# Altium PCB ORDER_1.PcbDoc
Units mm, origin at the board's own origin, x right, y up, seen from the top; angles counter-clockwise.
Board outline 187.32 x 224.38 mm, 2 copper layers (Top Layer, Bottom Layer); 119 components, 0 nets, 815 pads, 76 vias.
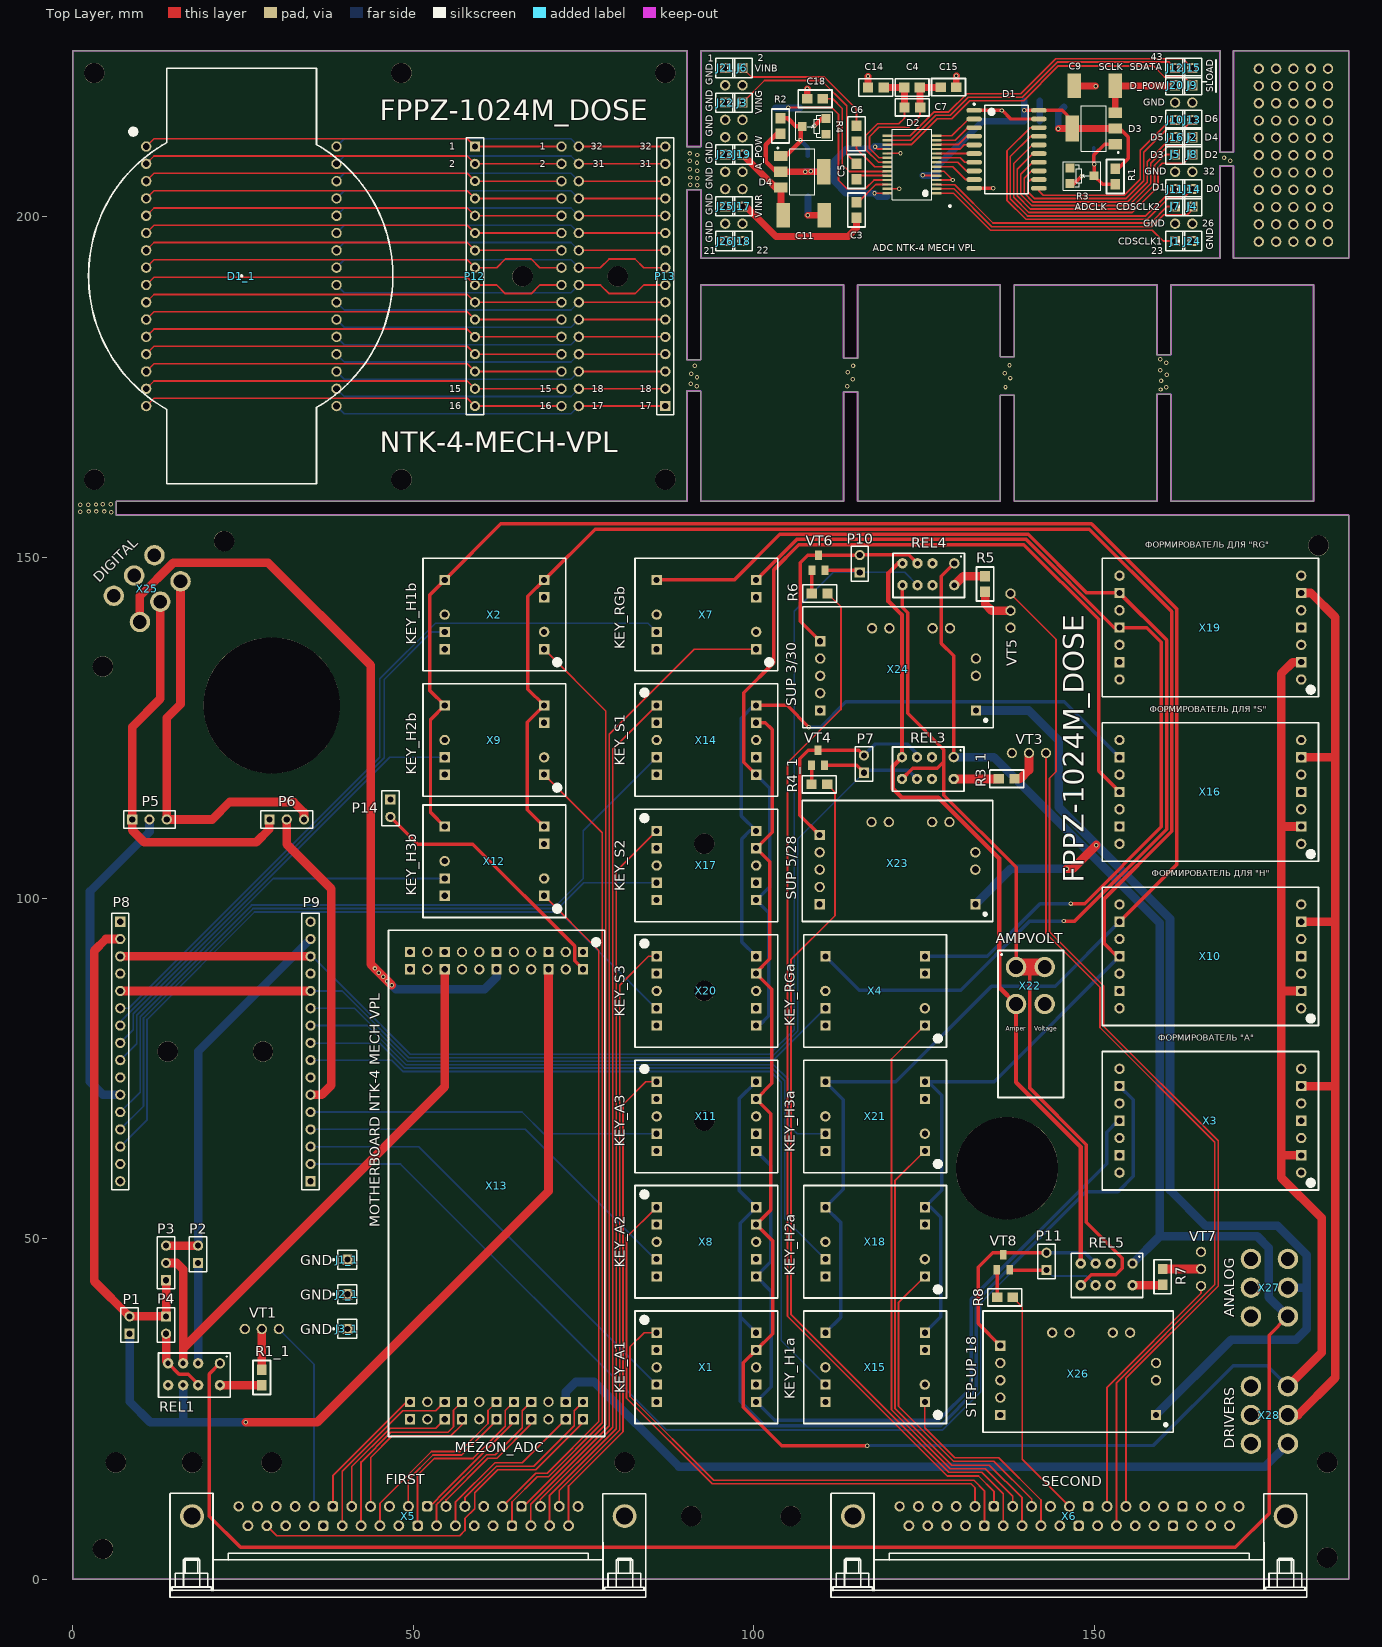
[diagram p0: Top Layer view]
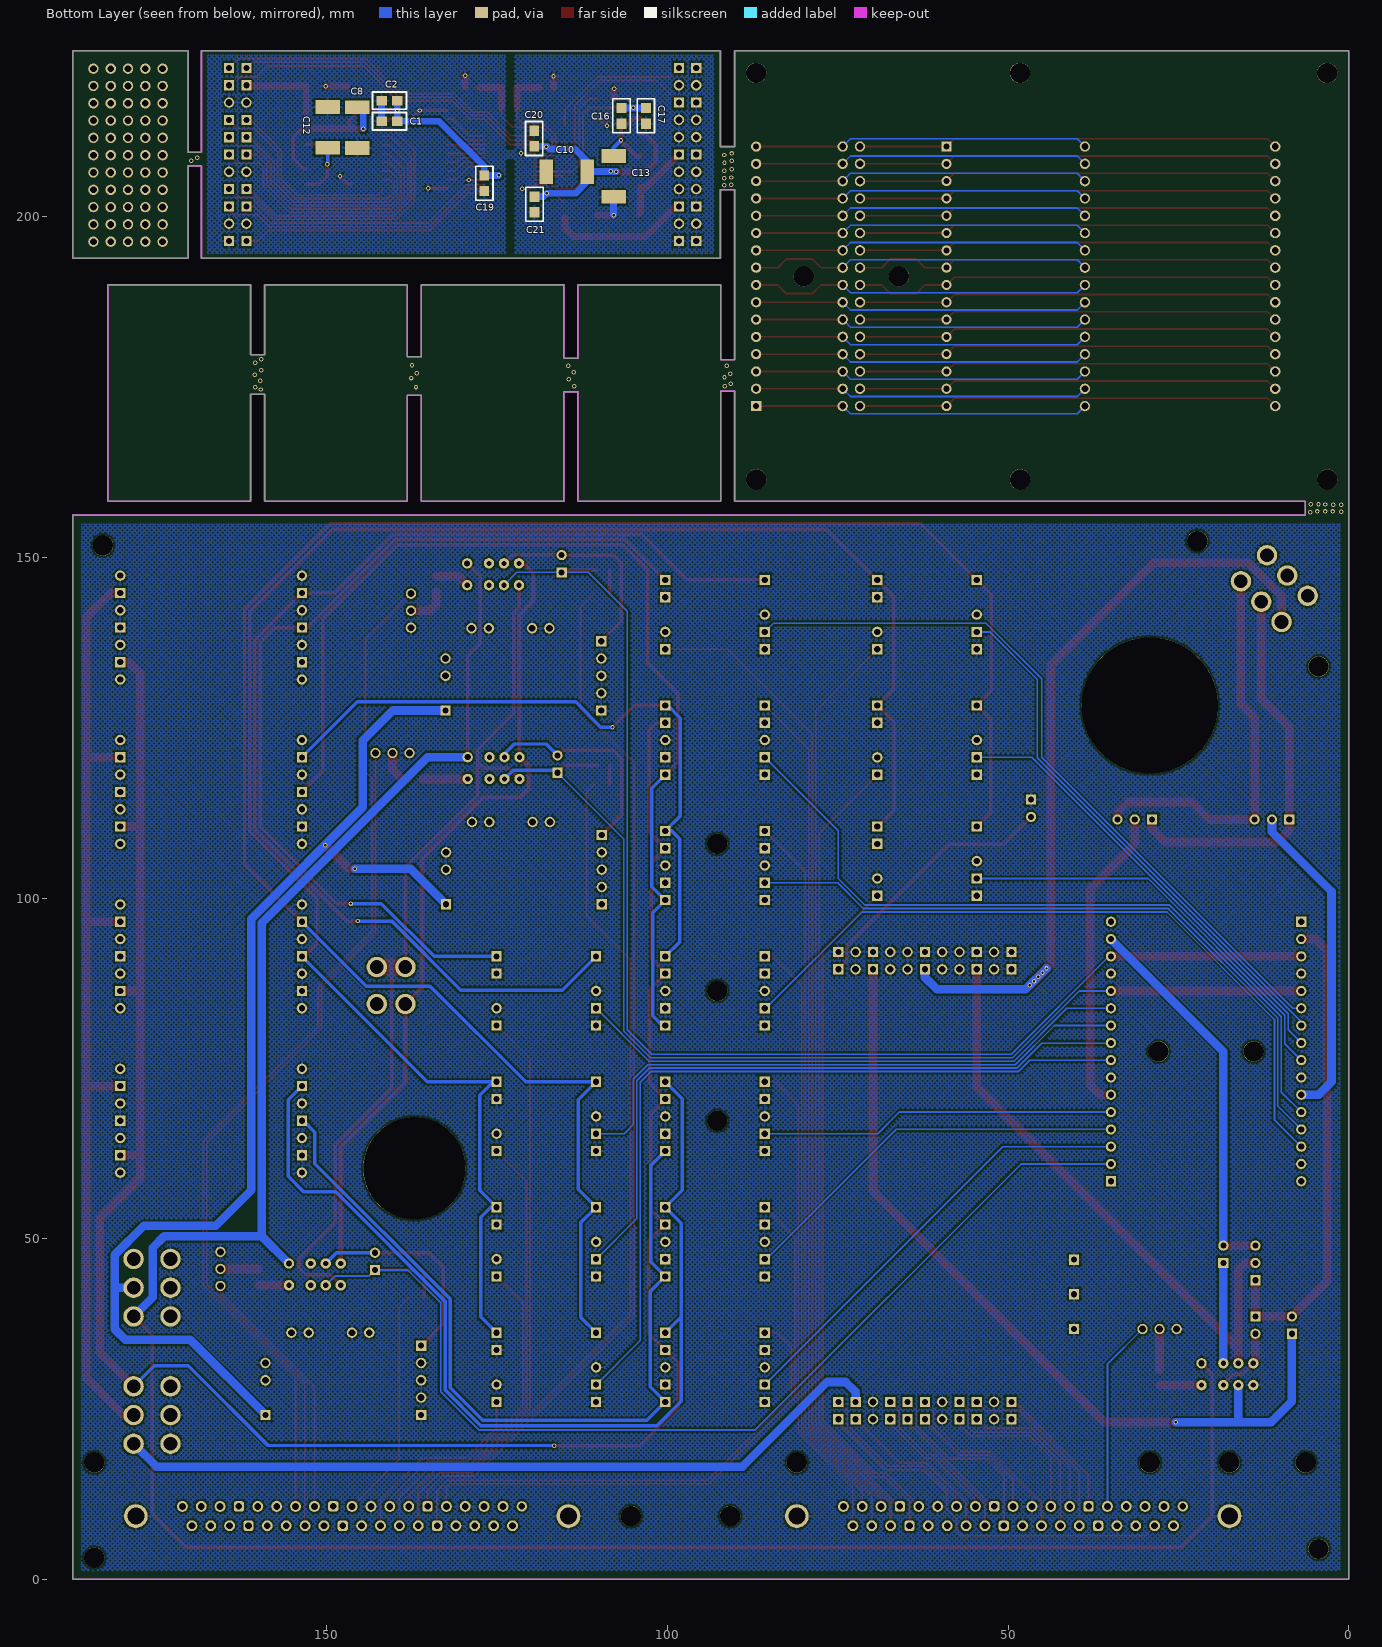
[diagram p1: Bottom Layer view, seen from below]

## Layer stack, top to bottom
Top Solder: solder mask 0.0102, Solder Resist, Dk 3.5
Top Layer: signal copper 0.0356
Dielectric 1: dielectric 0.32, FR-4, Dk 4.8
Bottom Layer: signal copper 0.0356
Bottom Solder: solder mask 0.0102, Solder Resist, Dk 3.5

## Board outline
0,0 0,224.384 90.17,224.384 90.17,210.312 92.229,210.312 92.229,224.384 168.429,224.384 168.429,209.475 170.383,209.475 170.383,224.384 187.325,224.384 187.325,193.904 170.383,193.904 170.383,207.467 168.429,207.467 168.429,193.904 92.229,193.904 92.229,203.962 90.17,203.962 90.17,179.019 92.202,179.019 92.202,189.992 113.157,189.992 113.157,179.248 115.214,179.248 115.214,189.992 136.144,189.992 136.144,179.451 138.201,179.451 138.201,189.992 159.156,189.992 159.156,179.73 161.214,179.73 161.214,189.992 182.143,189.992 182.143,158.242 161.214,158.242 161.214,173.939 159.156,173.939 159.156,158.242 150.749,158.242 138.201,158.242 138.201,173.812 136.144,173.812 136.144,158.242 115.214,158.242 115.214,174.295 113.157,174.295 113.157,158.242 104.445,158.242 92.202,158.242 92.202,174.422 90.17,174.422 90.17,158.242 6.401,158.242 6.401,156.21 187.325,156.21 187.325,0

## Design rules (kind name [scope] priority, off if disabled: settings)
Clearance [All] p1: gap=0.254
PolygonConnect [All] p1: connectstyle=Relief reliefconductorwidth=0.254 reliefentries=4 polygonreliefangle="90 Angle" airgapwidth=0.254
RoutingVias [All] p1: holewidth=0.711 width=1.27 viastyle="Through Hole" minholewidth=0.711 minwidth=1.27 maxholewidth=0.711 maxwidth=1.27
SolderMaskExpansion [All] p1: expansion=0.102
Width [All] p1: maxlimit=0.254 minlimit=0.254 preferedwidth=0.254
29 further rules are at their usual default settings.

## Components (designator, comment, footprint, x,y, rotation, side; value= is the part's Value field where it differs from the comment)
C1 "0,1" CAP_SMALL 143.334,212.75 r180 bottom
C2 "0,01" CAP_SMALL 143.334,215.773 r180 bottom
C3 "0,1" CAP_SMALL 116.334,198.501 r90 top
C4 "10,0" CAP_SMALL 125.732,220.243 r180 top
C5 "0,1" CAP_SMALL 113.794,209.144 r270 top
C6 "0,1" CAP_SMALL 113.794,214.706 r270 top
C7 "0,1" CAP_SMALL 125.757,217.322 r180 top
C8 "100,0" Cap_BIG 143.613,217.195 r0 bottom
C9 "10,0" Cap_BIG 154.129,217.297 r90 top
C10 "100,0" Cap_BIG 110.72,204.724 r90 bottom
C11 "10,0" Cap_BIG 103.227,202.133 r270 top
C12 "10,0" Cap_BIG 151.817,209.017 r180 bottom
C13 "10,0" Cap_BIG 106.021,210.007 r0 bottom
C14 "0,1" CAP_SMALL 120.398,220.243 r180 top
C15 "0,1" CAP_SMALL 126.062,217.754 r0 top
C16 "1,0" CAP_SMALL 105.488,212.319 r90 bottom
C17 "0,1" CAP_SMALL 104.446,217.322 r270 bottom
C18 "0,1" CAP_SMALL 106.478,216.052 r0 top
C19 "0,1" CAP_SMALL 125.63,202.413 r90 bottom
C20 "0,1" CAP_SMALL 120.855,213.995 r270 bottom
C21 "0,1" CAP_SMALL 118.264,199.314 r90 bottom
D1 "74AC541" 20S_M 137.085,209.906 r0 top
D1_1 "FPPZ 1024M" FPPZ_1024M 10.795,210.312 r270 top (schematic designator D1)
D2 "AD9826" SSOP-28 123.217,207.67 r90 top
D3 "LM1117-ADJ" SOT230P700X180-4N 149.887,212.954 r90 top
D4 "LM1117-ADJ" SOT230P700X180-4N 107.113,206.604 r270 top
J1 "CDSCLK1" PIN1 161.825,196.444 r270 top
J1_1 "GND" PIN1 40.335,46.914 r90 top (schematic designator J1)
J2 "D4" PIN1 164.365,211.684 r90 top
J2_1 "GND" PIN1 40.335,41.834 r90 top (schematic designator J2)
J3 "VING" PIN1 98.325,216.764 r90 top
J3_1 "GND" PIN1 40.335,36.754 r90 top (schematic designator J3)
J4 "CDSCLK2" PIN1 164.365,201.524 r90 top
J5 "D3" PIN1 161.825,209.144 r270 top
J6 "VINB" PIN1 98.325,221.844 r90 top
J7 "ADCCLK" PIN1 161.825,201.524 r270 top
J8 "D2" PIN1 164.365,209.144 r90 top
J9 "SLOAD" PIN1 164.365,219.304 r90 top
J10 "MSB (D7)" PIN1 161.825,214.224 r270 top
J11 "D1" PIN1 161.825,204.064 r270 top
J12 "SCLK" PIN1 161.825,221.844 r270 top
J13 "D6" PIN1 164.365,214.224 r90 top
J14 "(LSB) D0" PIN1 164.365,204.064 r90 top
J15 "SDATA" PIN1 164.365,221.844 r90 top
J16 "D5" PIN1 161.825,211.684 r270 top
J17 "VINR" PIN1 98.325,201.524 r90 top
J18 "GND" PIN1 98.325,196.444 r90 top
J19 "A_POW" PIN1 98.325,209.144 r90 top
J20 "D_POW" PIN1 161.825,219.304 r270 top
J21 "GND" PIN1 95.785,221.844 r270 top
J22 "GND" PIN1 95.785,216.764 r270 top
J23 "GND" PIN1 95.785,209.144 r270 top
J24 "GND" PIN1 164.365,196.444 r90 top
J25 "GND" PIN1 95.785,201.524 r270 top
J26 "GND" PIN1 95.785,196.444 r270 top
P1 "Header 2" HDR1X2 8.357,36.043 r90 top
P2 "Header 2" HDR1X2 18.415,46.431 r90 top
P3 "Header 3" HDR1X3 13.716,43.891 r90 top
P4 "Header 2" HDR1X2 13.716,38.583 r270 top
P5 "Header 3" HDR1X3 8.738,111.531 r0 top
P6 "Header 3" HDR1X3 28.88,111.531 r0 top
P7 "Header 2" HDR1X2 116.154,118.392 r90 top
P8 "Header 2" HDR1X16 6.985,96.52 r270 top
P9 "Header 2" HDR1X16 34.925,58.42 r90 top
P10 "Header 2" HDR1X2 115.545,147.803 r90 top
P11 "Header 2" HDR1X2 142.951,45.39 r90 top
P12 "Header 16" HDR1X16 59.055,210.312 r270 top
P13 "Header 16" HDR1X16 86.995,172.212 r90 top
P14 "Header 2" HDR1X2 46.634,114.452 r270 top
R1 "121" RES 154.281,208.382 r180 top
R1_1 "51" RES 29.007,32.106 r180 top (schematic designator R1)
R2 "121" RES 102.668,210.845 r0 top
R3 "1k" PODSR_RES 148.236,206.045 r270 top
R3_1 "51" RES 134.62,118.745 r270 top (schematic designator R3)
R4 "1k" PODSR_RES 108.764,213.258 r90 top
R4_1 "100" RES 112.087,115.443 r90 top (schematic designator R4)
R5 "51" RES 135.179,148.565 r180 top
R6 "100" RES 112.141,143.459 r90 top
R7 "51" RES 158.75,41.91 r0 top
R8 "100" RES 139.319,40.132 r90 top
REL1 "IM03TS" IM03TS 21.615,31.699 r180 top
REL3 "IM03TS" IM03TS 129.337,120.675 r180 top
REL4 "IM03TS" IM03TS 129.413,149.123 r180 top
REL5 "IM03TS" IM03TS 155.575,46.355 r180 top
VT1 "КТ315" KT315 30.277,36.728 r180 top
VT3 "КТ315" KT315 142.875,121.285 r180 top
VT4 "IRLML0060TRPbF" SOT23-BEC_MMBT3640*(Primary) 109.398,120.574 r0 top
VT5 "КТ315" KT315 137.668,144.678 r270 top
VT6 "IRLML0060TRPbF" SOT23-BEC_MMBT3640*(Primary) 109.474,149.225 r0 top
VT7 "КТ315" KT315 165.633,43.053 r90 top
VT8 "IRLML0060TRPbF" SOT23-BEC_MMBT3640*(Primary) 136.601,46.533 r0 top
X1 "KEY_A1" MEZON_V 85.725,36.195 r0 top
X2 "KEY_H1b" MEZON_H 69.215,136.525 r180 top
X3 "ФОРМИРОВАТЕЛЬ \"A\"" MEZON_V+H 180.34,59.69 r180 top
X4 "KEY_RGa" MEZON_H 125.095,81.28 r180 top
X5 "FIRST" CHEAP_CONN_FEMALE 81.026,9.271 r180 top
X6 "SECOND" CHEAP_CONN_FEMALE 178.054,9.271 r180 top
X7 "KEY_RGb" MEZON_H 100.33,136.525 r180 top
X8 "KEY_A2" MEZON_V 85.725,54.61 r0 top
X9 "KEY_H2b" MEZON_H 69.215,118.11 r180 top
X10 "ФОРМИРОВАТЕЛЬ ДЛЯ \"Н\"" MEZON_V+H 180.34,83.82 r180 top
X11 "KEY_A3" MEZON_V 85.725,73.025 r0 top
X12 "KEY_H3b" MEZON_H 69.215,100.33 r180 top
X13 "MEZON_ADC" MEZON_ADC 74.93,92.075 r270 top
X14 "KEY_S1" MEZON_V 85.725,128.27 r0 top
X15 "KEY_H1a" MEZON_H 125.095,26.035 r180 top
X16 "ФОРМИРОВАТЕЛЬ ДЛЯ \"S\"" MEZON_V+H 180.34,107.95 r180 top
X17 "KEY_S2" MEZON_V 85.725,109.855 r0 top
X18 "KEY_H2a" MEZON_H 125.095,44.45 r180 top
X19 "ФОРМИРОВАТЕЛЬ ДЛЯ \"RG\"" MEZON_V+H 180.34,132.08 r180 top
X20 "KEY_S3" MEZON_V 85.725,91.44 r0 top
X21 "KEY_H3a" MEZON_H 125.095,62.865 r180 top
X22 "AMPVOLT" AMP_VOLTMETER 138.481,89.865 r0 top
X23 "SUP 5/28" MEZON_STEP-UP 132.512,99.085 r180 top
X24 "SUP 3/30" MEZON_STEP-UP 132.588,127.533 r180 top
X25 "DIGITAL" POWER 7.468,148.895 r225 top
X26 "STEP-UP 18" MEZON_STEP-UP 159.029,24.13 r180 top
X27 "ANALOG" POWER 170.764,42.799 r270 top
X28 "DRIVERS" POWER 170.764,24.105 r270 top

## Footprints (in the part's own frame and the unit in brackets; to place one, negate y for a bottom-side part, rotate by r counter-clockwise, add the part's x,y. Pads: shape width x height; smd on the part's side, far side on the other; paste and mask are expansions set on the pad)
20S_M [mm] "20-Pin Small Outline Integrated Circuit 1.27 mm Pitch, IPC Low Density"
  oval 2.3x0.7 smd: 1(-4.75,5.715) 2(-4.75,4.445) 3(-4.75,3.175) 4(-4.75,1.905) 5(-4.75,0.635) 6(-4.75,-0.635) 7(-4.75,-1.905) 8(-4.75,-3.175) 9(-4.75,-4.445) 10(-4.75,-5.715) 11(4.75,-5.715) 12(4.75,-4.445) 13(4.75,-3.175) 14(4.75,-1.905) 15(4.75,-0.635) 16(4.75,0.635) 17(4.75,1.905) 18(4.75,3.175) 19(4.75,4.445) 20(4.75,5.715)
  silkscreen extent -4.87,-6.5 3.2,6.74, body extent -3.8,-6.5 3.8,6.5, height 2.67
AMP_VOLTMETER [mm] "AMP_VOLTMETER"
  round 3 hole 2: 1(0,0) 2(0,-5.423) 3(4.2,-5.423) 4(4.2,0)
  silkscreen extent -2.66,-19.17 6.94,2.42
Cap_BIG [mm] "FROM_MAX"
  rect 3.6x2 smd: 1(1.905,7.092) 2(1.905,1.092)
  body extent 0,-0.01 3.81,8.19, height 2.54
CAP_SMALL [mil] "FROM_MAX"
  rect 60x55.98 smd: 1(53.71,50) 2(143.71,50)
  silkscreen extent 1,0 197,100, body extent 20,18 178,82, height 100
CHEAP_CONN_FEMALE [mm] "CHEAP_CONN_FEMALE"
  round 1.6 hole 1: 1(6.833,-1.422) 2(9.601,-1.422) 3(12.37,-1.422) 5(17.907,-1.422) 6(20.676,-1.422) 7(23.444,-1.422) 8(26.213,-1.422) 10(31.75,-1.422) 11(34.519,-1.422) 12(37.287,-1.422) 13(40.056,-1.422) 15(45.593,-1.422) 16(48.362,-1.422) 17(51.13,-1.422) 18(53.899,-1.422) 20(8.23,1.422) 21(10.998,1.422) 22(13.767,1.422) 24(19.304,1.422) 25(22.073,1.422) 26(24.841,1.422) 27(27.61,1.422) 29(33.147,1.422) 30(35.916,1.422) 31(38.684,1.422) 32(41.453,1.422) 34(46.99,1.422) 35(49.759,1.422) 36(52.527,1.422) 37(55.296,1.422)
  rrect50% 1.524x1.524 hole 0.965: 4(15.138,-1.422) 9(28.981,-1.422) 14(42.824,-1.422) 23(16.535,1.422) 28(30.378,1.422) 33(44.221,1.422)
  round 1.524 hole 0.965: 19(56.667,-1.422)
  round 3.5 hole 2.5: 38(0,0) 39(63.5,0)
  silkscreen extent -3.11,-3.36 66.72,11.92
FPPZ_1024M [mil]
  round 60 hole 39.37: 1(0,0) 2(100,0) 3(200,0) 4(300,0) 5(400,0) 6(500,0) 7(600,0) 8(700,0) 9(800,0) 10(900,0) 11(1000,0) 12(1100,0) 13(1200,0) 14(1300,0) 15(1400,0) 16(1500,0) 17(1500,1100) 18(1400,1100) 19(1300,1100) 20(1200,1100) 21(1100,1100) 22(1000,1100) 23(900,1100) 24(800,1100) 25(700,1100) 26(600,1100) 27(500,1100) 28(400,1100) 29(300,1100) 30(200,1100) 31(100,1100) 32(0,1100)
  silkscreen extent -453,-333 1949,1425
HDR1X2 [mm] "Connector; Header; 2 Position"
  rect 1.5x1.5 hole 0.9: 1(0,0)
  round 1.5 hole 0.9: 2(2.54,0)
  silkscreen extent -1.27,-1.27 3.81,1.27
HDR1X3 [mm] "Connector; Header; 3 Position"
  rect 1.5x1.5 hole 0.9: 1(0,0)
  round 1.5 hole 0.9: 2(2.54,0) 3(5.08,0)
  silkscreen extent -1.27,-1.27 6.35,1.27
HDR1X16 [mm] "Connector; Header; 16 Position"
  rect 1.5x1.5 hole 0.9: 1(0,0)
  round 1.5 hole 0.9: 2(2.54,0) 3(5.08,0) 4(7.62,0) 5(10.16,0) 6(12.7,0) 7(15.24,0) 8(17.78,0) 9(20.32,0) 10(22.86,0) 11(25.4,0) 12(27.94,0) 13(30.48,0) 14(33.02,0) 15(35.56,0) 16(38.1,0)
  silkscreen extent -1.27,-1.27 39.37,1.27
IM03TS [mil] "IM03TS"
  round 60 hole 35.43: 1(0,0)
  round 60 hole 30: 2(125.98,0) 3(212.6,0) 4(299.21,0) 5(299.21,125.98) 6(212.6,125.98) 7(125.98,125.98) 8(0,125.98)
  silkscreen extent -59,-59 354,197
KT315 [mil] "KT315"
  round 60 hole 39.37: 1(0,0) 2(98.43,0) 3(196.85,0)
MEZON_ADC [mm] "MEZON_ADC"
  rect 1.5x1.5 hole 0.9: 1(0,0) 2(2.54,0) 5(0,-5.08) 6(2.54,-5.08) 11(0,-12.7) 12(2.54,-12.7) 17(0,-20.32) 18(2.54,-20.32) 21(0,-25.4) 22(2.54,-25.4) 23(66.04,-25.4) 24(68.58,-25.4) 27(66.04,-20.32) 28(68.58,-20.32) 29(66.04,-17.78) 30(68.58,-17.78) 33(66.04,-12.7) 34(68.58,-12.7) 35(66.04,-10.16) 36(68.58,-10.16) 37(66.04,-7.62) 38(68.58,-7.62) 41(66.04,-2.54) 42(68.58,-2.54) 43(66.04,0) 44(68.58,0)
  round 1.524 hole 1: 3(0,-2.54) 4(2.54,-2.54) 7(0,-7.62) 8(2.54,-7.62) 9(0,-10.16) 10(2.54,-10.16) 13(0,-15.24) 14(2.54,-15.24) 15(0,-17.78) 16(2.54,-17.78) 19(0,-22.86) 20(2.54,-22.86) 25(66.04,-22.86) 26(68.58,-22.86) 31(66.04,-15.24) 32(68.58,-15.24) 39(66.04,-5.08) 40(68.58,-5.08)
  silkscreen extent -3.18,-28.57 71.12,3.18
MEZON_H [mm]
  rect 1.5x1.5 hole 0.9: 1(0,0) 3(0,-7.62) 4(0,-10.16) 5(14.605,-10.16) 7(14.605,-2.54) 8(14.605,0)
  round 1.524 hole 0.9: 2(0,-2.54) 6(14.605,-5.08)
  silkscreen extent -3.18,-13.33 17.78,3.18
MEZON_STEP-UP [mm] "MEZON_STEP-UP"
  rect 1.5x1.5 hole 0.9: 1(0,0) 8(22.86,-10.16) 12(22.86,0)
  round 1.524 hole 1: 2(0,-5.08) 3(0,-7.62) 4(3.81,-12.065) 5(6.35,-12.065) 6(12.7,-12.065) 7(15.24,-12.065) 9(22.86,-7.62) 10(22.86,-5.08) 11(22.86,-2.54)
  silkscreen extent -2.54,-15.24 25.4,2.54
MEZON_V [mm]
  rect 1.5x1.5 hole 0.9: 1(0,0) 2(0,-2.54) 4(0,-7.62) 5(0,-10.16) 6(14.605,-10.16) 7(14.605,-7.62) 9(14.605,-2.54) 10(14.605,0)
  round 1.524 hole 0.9: 3(0,-5.08) 8(14.605,-5.08)
  silkscreen extent -3.17,-13.33 17.78,3.17
MEZON_V+H [mm] "MEZON_V+H"
  round 1.524 hole 0.9: 1(0,0) 3(0,-5.08) 5(0,-10.16) 7(0,-15.24) 8(26.67,-15.24) 10(26.67,-10.16) 12(26.67,-5.08) 14(26.67,0)
  rect 1.5x1.5 hole 0.9: 2(0,-2.54) 4(0,-7.62) 6(0,-12.7) 9(26.67,-12.7) 11(26.67,-7.62) 13(26.67,-2.54)
  silkscreen extent -2.54,-17.78 29.21,2.54
PIN1 [mm] "Connector; Plug"
  rect 1.5x1.5 hole 0.9: 1(0,0)
  silkscreen extent -1.4,-1.4 1.4,2.18
PODSR_RES [mm] "PODSR_RES"
  rect 1.3x1.3 smd: 1(-1.136,-1.83) 2(0.014,1.67) 3(1.164,-1.83)
  silkscreen extent -2.03,-2.82 2.14,2.64
POWER [mm] "POWER"
  round 3 hole 2: 1(4.218,7.62) 2(0,7.62) 3(-4.218,7.62) 4(4.218,2.198) 5(0,2.198) 6(-4.218,2.198)
RES [mil] "FROM_MAX"
  rect 55.98x60 smd: 1(49,52.71) 2(49,142.71)
  silkscreen extent -1,0 99,196, body extent 17,19 81,177, height 100
SOT23-BEC_MMBT3640*(Primary) [mm]
  rect 1x1.4 smd: 1(-0.95,-1.1) 2(0.95,-1.1) 3(0,1.1)
SOT230P700X180-4N [mm]
  rect 1.5x2 smd: 1(-2.3,-3.15) 2(0,-3.15) 3(2.3,-3.15)
  rect 3.8x2 smd: 4(0,3.15)
  silkscreen extent -3.6,-3.7 3.35,1.85
SSOP-28 [mm]
  rect 0.348x1.397 smd: 1(-4.225,-3.656) 2(-3.575,-3.656) 3(-2.925,-3.656) 4(-2.275,-3.656) 5(-1.625,-3.656) 6(-0.975,-3.656) 7(-0.325,-3.656) 8(0.325,-3.656) 9(0.975,-3.656) 10(1.625,-3.656) 11(2.275,-3.656) 12(2.925,-3.656) 13(3.575,-3.656) 14(4.225,-3.656) 15(4.225,3.656) 16(3.575,3.656) 17(2.925,3.656) 18(2.275,3.656) 19(1.625,3.656) 20(0.975,3.656) 21(0.325,3.656) 22(-0.325,3.656) 23(-0.975,3.656) 24(-1.625,3.656) 25(-2.275,3.656) 26(-2.925,3.656) 27(-3.575,3.656) 28(-4.225,3.656)
  silkscreen extent -5.2,-2.93 5.2,2.93

## Part data
C1 C2 C3 C4 C5 C6 C7 C14 C15 C16 C17 C18 C19 C20 C21: library part CAP_SMALL
C8 C9 C10 C11 C12 C13: library part CAP_BIG
J1 J1_1 J2 J2_1 J3 J3_1 J4 J5 J6 J7 J8 J9 J10 J11 J12 J13 J14 J15 J16 J17 J18 J19 J20 J21 J22 J23 J24 J25 J26: library part Socket, "Socket"
P1 P2 P4 P7 P10 P11 P14: "Header, 2-Pin"
P3 P5 P6: "Header, 3-Pin"
P8 P9: library part "Header 16", "Header, 16-Pin"
P12 P13: "Header, 16-Pin"
R1 R1_1 R2 R3_1 R4_1 R5 R6 R7 R8: library part RES
R3 R4: library part RES_PODSTR
X1 X8 X11 X14 X17 X20: library part MEZON_V
X2 X4 X7 X9 X12 X15 X18 X21: library part MEZON_H
X3 X10 X16 X19: library part MEZON_V+H
X5 X6: library part CHEAP_CON_37_FEMALE
X22: library part AMP_VOLTMETER
X23 X24 X26: library part MEZON_STEP-UP
X25 X27 X28: library part POWER

## Free pads (board coordinates)
  round 3 hole 3 unplated: 0(3.175,161.417) 0(3.175,221.107) 0(4.445,4.445) 0(4.445,133.985) 0(6.35,17.145) 0(13.97,77.47) 0(17.526,17.145) 0(22.225,152.4) 0(27.94,77.47) 0(29.21,17.145) 0(48.26,161.417) 0(48.26,221.107) 0(66.04,191.262) 0(80.01,191.262) 0(81.026,17.145) 0(86.995,161.417) 0(86.995,221.107) 0(90.805,9.271) 0(92.71,67.31) 0(92.71,86.36) 0(92.71,107.95) 0(105.41,9.271) 0(182.88,151.765) 0(184.15,3.175) 0(184.15,17.145)
  round 20 hole 20 unplated: 0(29.21,128.27)
  round 1.524 hole 1: 0(71.755,172.212) 0(71.755,174.752) 0(71.755,177.292) 0(71.755,179.832) 0(71.755,182.372) 0(71.755,184.912) 0(71.755,187.452) 0(71.755,189.992) 0(71.755,192.532) 0(71.755,195.072) 0(71.755,197.612) 0(71.755,200.152) 0(71.755,202.692) 0(71.755,205.232) 0(71.755,207.772) 0(71.755,210.312) 0(74.295,172.212) 0(74.295,174.752) 0(74.295,177.292) 0(74.295,179.832) 0(74.295,182.372) 0(74.295,184.912) 0(74.295,187.452) 0(74.295,189.992) 0(74.295,192.532) 0(74.295,195.072) 0(74.295,197.612) 0(74.295,200.152) 0(74.295,202.692) 0(74.295,205.232) 0(74.295,207.772) 0(74.295,210.312) 0(95.785,198.984) 0(95.785,204.064) 0(95.785,206.604) 0(95.785,211.684) 0(95.785,214.224) 0(95.785,219.304) 0(98.325,198.984) 0(98.325,204.064) 0(98.325,206.604) 0(98.325,211.684) 0(98.325,214.224) 0(98.325,219.304) 0(161.825,198.984) 0(161.825,206.604) 0(161.825,216.764) 0(164.365,198.984) 0(164.365,206.604) 0(164.365,216.764) 0(174.117,196.342) 0(174.117,198.882) 0(174.117,201.422) 0(174.117,203.962) 0(174.117,206.502) 0(174.117,209.042) 0(174.117,211.582) 0(174.117,214.122) 0(174.117,216.662) 0(174.117,219.202) 0(174.117,221.742) 0(176.657,196.342) 0(176.657,198.882) 0(176.657,201.422) 0(176.657,203.962) 0(176.657,206.502) 0(176.657,209.042) 0(176.657,211.582) 0(176.657,214.122) 0(176.657,216.662) 0(176.657,219.202) 0(176.657,221.742) 0(179.197,196.342) 0(179.197,198.882) 0(179.197,201.422) 0(179.197,203.962) 0(179.197,206.502) 0(179.197,209.042) 0(179.197,211.582) 0(179.197,214.122) 0(179.197,216.662) 0(179.197,219.202) 0(179.197,221.742) 0(181.737,196.342) 0(181.737,198.882) 0(181.737,201.422) 0(181.737,203.962) 0(181.737,206.502) 0(181.737,209.042) 0(181.737,211.582) 0(181.737,214.122) 0(181.737,216.662) 0(181.737,219.202) 0(181.737,221.742) 0(184.277,196.342) 0(184.277,198.882) 0(184.277,201.422) 0(184.277,203.962) 0(184.277,206.502) 0(184.277,209.042) 0(184.277,211.582) 0(184.277,214.122) 0(184.277,216.662) 0(184.277,219.202) 0(184.277,221.742)
  round 15 hole 15 unplated: 0(137.16,60.325)

## Via types
v1: diameter 0.65, hole 0.35, Top Layer to Bottom Layer, 76 vias

## Nets (pads, with @x,y where several pads share a name; then routed paths per layer and width w, separated by ;. In a path a pad name is that pad's centre, name@x,y a point inside that pad or via, vN(x,y) a via of type N, cw(c..) or ccw(c..) an arc to the next point about the centre after c; other vN are vias at no path point)
pads on no net: C1.1 C1.2 C2.1 C2.2 C3.1 C3.2 C4.1 C4.2 C5.1 C5.2 C6.1 C6.2 C7.1 C7.2 C8.1 C8.2 C9.1 C9.2 C10.1 C10.2 C11.1 C11.2 C12.1 C12.2 C13.1 C13.2 C14.1 C14.2 C15.1 C15.2 C16.1 C16.2 C17.1 C17.2 C18.1 C18.2 C19.1 C19.2 C20.1 C20.2 C21.1 C21.2 D1.1 D1.2 D1.3 D1.4 D1.5 D1.6 D1.7 D1.8 D1.9 D1.10 D1.11 D1.12 D1.13 D1.14 D1.15 D1.16 D1.17 D1.18 D1.19 D1.20 D1_1.1 D1_1.2 D1_1.3 D1_1.4 D1_1.5 D1_1.6 D1_1.7 D1_1.8 D1_1.9 D1_1.10 D1_1.11 D1_1.12 D1_1.13 D1_1.14 D1_1.15 D1_1.16 D1_1.17 D1_1.18 D1_1.19 D1_1.20 D1_1.21 D1_1.22 D1_1.23 D1_1.24 D1_1.25 D1_1.26 D1_1.27 D1_1.28 D1_1.29 D1_1.30 D1_1.31 D1_1.32 D2.1 D2.2 D2.3 D2.4 D2.5 D2.6 D2.7 D2.8 D2.9 D2.10 D2.11 D2.12 D2.13 D2.14 D2.15 D2.16 D2.17 D2.18 D2.19 D2.20 D2.21 D2.22 D2.23 D2.24 D2.25 D2.26 D2.27 D2.28 D3.1 D3.2 D3.3 D3.4 D4.1 D4.2 D4.3 D4.4 J1.1 J1_1.1 J2.1 J2_1.1 J3.1 J3_1.1 J4.1 J5.1 J6.1 J7.1 J8.1 J9.1 J10.1 J11.1 J12.1 J13.1 J14.1 J15.1 J16.1 J17.1 J18.1 J19.1 J20.1 J21.1 J22.1 J23.1 J24.1 J25.1 J26.1 P1.1 P1.2 P2.1 P2.2 P3.1 P3.2 P3.3 P4.1 P4.2 P5.1 P5.2 P5.3 P6.1 P6.2 P6.3 P7.1 P7.2 P8.1 P8.2 P8.3 P8.4 P8.5 P8.6 P8.7 P8.8 P8.9 P8.10 P8.11 P8.12 P8.13 P8.14 P8.15 P8.16 P9.1 P9.2 P9.3 P9.4 P9.5 P9.6 P9.7 P9.8 P9.9 P9.10 P9.11 P9.12 P9.13 P9.14 P9.15 P9.16 P10.1 P10.2 P11.1 P11.2 P12.1 P12.2 P12.3 P12.4 P12.5 P12.6 P12.7 P12.8 P12.9 P12.10 P12.11 P12.12 P12.13 P12.14 P12.15 P12.16 P13.1 P13.2 P13.3 P13.4 P13.5 P13.6 P13.7 P13.8 P13.9 P13.10 P13.11 P13.12 P13.13 P13.14 P13.15 P13.16 P14.1 P14.2 R1.1 R1.2 R1_1.1 R1_1.2 R2.1 R2.2 R3.1 R3.2 R3.3 R3_1.1 R3_1.2 R4.1 R4.2 R4.3 R4_1.1 R4_1.2 R5.1 R5.2 R6.1 R6.2 R7.1 R7.2 R8.1 R8.2 REL1.1 REL1.2 REL1.3 REL1.4 REL1.5 REL1.6 REL1.7 REL1.8 REL3.1 REL3.2 REL3.3 REL3.4 REL3.5 REL3.6 REL3.7 REL3.8 REL4.1 REL4.2 REL4.3 REL4.4 REL4.5 REL4.6 REL4.7 REL4.8 REL5.1 REL5.2 REL5.3 REL5.4 REL5.5 REL5.6 REL5.7 REL5.8 VT1.1 VT1.2 VT1.3 VT3.1 VT3.2 VT3.3 VT4.1 VT4.2 VT4.3 VT5.1 VT5.2 VT5.3 VT6.1 VT6.2 VT6.3 VT7.1 VT7.2 VT7.3 VT8.1 VT8.2 VT8.3 X1.1 X1.2 X1.3 X1.4 X1.5 X1.6 X1.7 X1.8 X1.9 X1.10 X2.1 X2.2 X2.3 X2.4 X2.5 X2.6 X2.7 X2.8 X3.1 X3.2 X3.3 X3.4 X3.5 X3.6 X3.7 X3.8 X3.9 X3.10 X3.11 X3.12 X3.13 X3.14 X4.1 X4.2 X4.3 X4.4 X4.5 X4.6 X4.7 X4.8 X5.1 X5.2 X5.3 X5.4 X5.5 X5.6 X5.7 X5.8 X5.9 X5.10 X5.11 X5.12 X5.13 X5.14 X5.15 X5.16 X5.17 X5.18 X5.19 X5.20 X5.21 X5.22 X5.23 X5.24 X5.25 X5.26 X5.27 X5.28 X5.29 X5.30 X5.31 X5.32 X5.33 X5.34 X5.35 X5.36 X5.37 X5.38 X5.39 X6.1 X6.2 X6.3 X6.4 X6.5 X6.6 X6.7 X6.8 X6.9 X6.10 X6.11 X6.12 X6.13 X6.14 X6.15 X6.16 X6.17 X6.18 X6.19 X6.20 X6.21 X6.22 X6.23 X6.24 X6.25 X6.26 X6.27 X6.28 X6.29 X6.30 X6.31 X6.32 X6.33 X6.34 X6.35 X6.36 X6.37 X6.38 X6.39 X7.1 X7.2 X7.3 X7.4 X7.5 X7.6 X7.7 X7.8 X8.1 X8.2 X8.3 X8.4 X8.5 X8.6 X8.7 X8.8 X8.9 X8.10 X9.1 X9.2 X9.3 X9.4 X9.5 X9.6 X9.7 X9.8 X10.1 X10.2 X10.3 X10.4 X10.5 X10.6 X10.7 X10.8 X10.9 X10.10 X10.11 X10.12 X10.13 X10.14 X11.1 X11.2 X11.3 X11.4 X11.5 X11.6 X11.7 X11.8 X11.9 X11.10 X12.1 X12.2 X12.3 X12.4 X12.5 X12.6 X12.7 X12.8 X13.1 X13.2 X13.3 X13.4 X13.5 X13.6 X13.7 X13.8 X13.9 X13.10 X13.11 X13.12 X13.13 X13.14 X13.15 X13.16 X13.17 X13.18 X13.19 X13.20 X13.21 X13.22 X13.23 X13.24 X13.25 X13.26 X13.27 X13.28 X13.29 X13.30 X13.31 X13.32 X13.33 X13.34 X13.35 X13.36 X13.37 X13.38 X13.39 X13.40 X13.41 X13.42 X13.43 X13.44 X14.1 X14.2 X14.3 X14.4 X14.5 X14.6 X14.7 X14.8 X14.9 X14.10 X15.1 X15.2 X15.3 X15.4 X15.5 X15.6 X15.7 X15.8 X16.1 X16.2 X16.3 X16.4 X16.5 X16.6 X16.7 X16.8 X16.9 X16.10 X16.11 X16.12 X16.13 X16.14 X17.1 X17.2 X17.3 X17.4 X17.5 X17.6 X17.7 X17.8 X17.9 X17.10 X18.1 X18.2 X18.3 X18.4 X18.5 X18.6 X18.7 X18.8 X19.1 X19.2 X19.3 X19.4 X19.5 X19.6 X19.7 X19.8 X19.9 X19.10 X19.11 X19.12 X19.13 X19.14 X20.1 X20.2 X20.3 X20.4 X20.5 X20.6 X20.7 X20.8 X20.9 X20.10 X21.1 X21.2 X21.3 X21.4 X21.5 X21.6 X21.7 X21.8 X22.1 X22.2 X22.3 X22.4 X23.1 X23.2 X23.3 X23.4 X23.5 X23.6 X23.7 X23.8 X23.9 X23.10 X23.11 X23.12 X24.1 X24.2 X24.3 X24.4 X24.5 X24.6 X24.7 X24.8 X24.9 X24.10 X24.11 X24.12 X25.1 X25.2 X25.3 X25.4 X25.5 X25.6 X26.1 X26.2 X26.3 X26.4 X26.5 X26.6 X26.7 X26.8 X26.9 X26.10 X26.11 X26.12 X27.1 X27.2 X27.3 X27.4 X27.5 X27.6 X28.1 X28.2 X28.3 X28.4 X28.5 X28.6
copper on no net: | length 10436.9
  Top Layer w0.254: 10.795,172.212 11.938,173.355 57.912,173.355 59.055,172.212 71.755,172.212 ; 10.795,174.752 11.938,175.895 57.912,175.895 59.055,174.752 71.755,174.752 ; 10.795,177.292 11.938,178.435 57.912,178.435 59.055,177.292 71.755,177.292 ; 10.795,179.832 11.938,180.975 57.912,180.975 59.055,179.832 71.755,179.832 ; 10.795,182.372 11.938,183.515 57.912,183.515 59.055,182.372 71.755,182.372 ; 10.795,184.912 11.938,186.055 57.912,186.055 59.055,184.912 71.755,184.912 ; 10.795,187.452 11.938,188.595 57.912,188.595 59.055,187.452 71.755,187.452 ; 10.795,189.992 11.938,191.135 57.912,191.135 59.055,189.992 62.23,189.992 63.5,188.722 67.31,188.722 68.58,189.992 71.755,189.992 ; 10.795,192.532 11.938,193.675 57.912,193.675 59.055,192.532 62.23,192.532 63.5,193.802 67.31,193.802 68.58,192.532 71.755,192.532 ; 10.795,195.072 11.938,196.215 57.912,196.215 59.055,195.072 71.755,195.072 ; 10.795,197.612 11.938,198.755 57.912,198.755 59.055,197.612 71.755,197.612 ; 10.795,200.152 11.938,201.295 57.912,201.295 59.055,200.152 71.755,200.152 ; 10.795,202.692 11.938,203.835 57.912,203.835 59.055,202.692 71.755,202.692 ; 10.795,205.232 11.938,206.375 57.912,206.375 59.055,205.232 71.755,205.232 ; 10.795,207.772 11.938,208.915 57.912,208.915 59.055,207.772 71.755,207.772 ; 10.795,210.312 11.938,211.455 57.912,211.455 59.055,210.312 71.755,210.312 ; 28.499,7.849 29.947,6.401 56.82,6.401 57.582,7.163 57.582,8.915 59.03,10.363 59.03,12.686 62.422,16.078 67.964,16.078 74.93,23.044 74.93,23.495 ; 35.331,10.693 35.433,10.795 35.433,10.693 ; 38.202,10.693 38.202,15.215 49.022,26.035 49.53,26.035 ; 39.573,7.849 39.573,15.868 48.445,24.74 53.315,24.74 54.61,26.035 ; 40.97,10.693 40.97,16.546 46.598,22.174 53.289,22.174 54.61,23.495 ; 42.342,7.849 42.342,17.2 46.707,21.565 55.093,21.565 55.905,22.377 55.905,24.79 57.15,26.035 ; 43.739,10.693 43.739,17.878 46.917,21.057 55.499,21.057 57.15,22.708 57.15,23.495 ; 45.11,7.849 45.11,11.176 52.68,18.745 56.845,18.745 60.96,22.86 60.96,24.765 62.23,26.035 ; 49.276,10.693 49.276,14.623 52.89,18.237 57.129,18.237 62.23,23.338 62.23,23.495 ; 50.648,7.849 50.626,7.87 50.626,15.255 53.1,17.729 58.75,17.729 63.5,22.479 63.5,24.765 64.77,26.035 ; 52.045,10.693 52.433,10.693 53.124,11.385 53.124,11.393 54.114,12.382 54.122,12.382 64.77,23.031 64.77,23.495 ; 53.416,7.849 53.416,10.958 53.632,11.174 53.632,11.183 54.324,11.874 54.332,11.874 60.746,18.288 62.052,18.288 66.015,22.25 66.015,24.74 67.31,26.035 ; 54.813,10.693 54.813,11.637 60.956,17.78 62.285,17.78 67.31,22.805 67.31,23.495 ; 56.185,7.849 56.185,11.278 62.001,17.094 65.989,17.094 72.39,23.495 ; 57.582,10.693 57.582,11.956 62.212,16.586 67.691,16.586 73.635,22.53 73.635,24.74 74.93,26.035 ; 63.119,10.693 67.996,15.57 69.647,15.57 77.241,23.165 77.241,92.304 69.215,100.33 ; 64.491,7.849 64.491,11.347 68.206,15.062 69.857,15.062 77.749,22.954 77.749,109.576 69.215,118.11 ; 65.888,10.693 66.207,10.693 78.257,22.744 78.257,127.457 69.215,136.5 69.215,136.525 ; 67.259,7.849 67.259,11.027 78.765,22.533 78.765,124.054 91.237,136.525 100.33,136.525 ; 68.656,10.693 68.656,11.706 79.273,22.323 79.273,121.818 85.725,128.27 ; 70.028,7.849 70.008,7.869 70.008,12.339 79.781,22.112 79.781,103.911 85.725,109.855 ; 71.425,10.693 71.425,13.037 80.289,21.902 80.289,87.198 84.531,91.44 85.725,91.44 ; 72.796,7.849 72.796,13.691 80.797,21.692 80.797,69.698 84.125,73.025 85.725,73.025 ; 74.295,172.212 86.995,172.212 ; 74.295,174.752 86.995,174.752 ; 74.295,177.292 86.995,177.292 ; 74.295,179.832 86.995,179.832 ; 74.295,182.372 86.995,182.372 ; 74.295,184.912 86.995,184.912 ; 74.295,187.452 86.995,187.452 ; 74.295,189.992 77.47,189.992 78.74,188.722 82.55,188.722 83.82,189.992 86.995,189.992 ; 74.295,192.532 77.47,192.532 78.74,193.802 82.55,193.802 83.82,192.532 86.995,192.532 ; 74.295,195.072 86.995,195.072 ; 74.295,197.612 86.995,197.612 ; 74.295,200.152 86.995,200.152 ; 74.295,202.692 86.995,202.692 ; 74.295,205.232 86.995,205.232 ; 74.295,207.772 86.995,207.772 ; 74.295,210.312 86.995,210.312 ; 85.725,36.195 83.896,36.195 81.813,34.112 81.813,26.822 94.107,14.529 132.309,14.529 133.833,13.005 133.833,7.849 ; 85.725,54.61 81.305,50.19 81.305,26.582 93.866,14.021 131.87,14.021 132.461,13.429 132.461,10.693 ; 98.325,216.764 101.56,219.999 109.924,219.999 113.641,216.281 113.641,209.202 115.064,207.779 ; 98.325,221.844 99.646,220.523 110.321,220.523 115.064,215.78 115.064,213.342 ; v1(105.056,216.027) 111.457,216.027 112.422,215.062 112.422,205.359 113.667,204.114 116.359,204.114 117.64,205.395 119.561,205.395 ; 110.129,217.322 111.558,217.322 112.981,215.9 112.981,207.645 113.989,206.636 119.502,206.636 119.561,206.695 ; 110.748,116.688 111.912,115.523 111.912,97.409 105.435,90.932 105.435,38.913 128.628,15.721 133.428,15.721 136.601,12.548 136.601,7.849 ; 110.802,144.704 112.776,142.73 112.776,127.686 104.927,119.837 104.927,38.633 128.397,15.164 132.962,15.164 135.23,12.896 135.23,10.693 ; 115.064,202.151 115.31,202.151 117.904,204.745 119.561,204.745 ; 115.064,205.493 115.616,206.045 119.561,206.045 ; 115.064,211.056 115.064,210.007 117.725,207.345 119.561,207.345 ; v1@117.629,203.429 117.646,203.445 v1(117.705,203.445) 119.561,203.445 ; v1(117.781,210.287) 118.123,209.945 119.561,209.945 ; 119.561,204.095 v1@121.382,204.095 ; 119.561,207.995 118.287,207.995 116.435,209.848 116.435,211.938 118.137,213.639 121.261,213.639 122.107,214.485 122.107,216.052 ; 119.561,208.645 118.356,208.645 116.969,210.033 116.969,211.753 118.347,213.131 122.734,213.131 124.393,214.79 124.393,216.052 ; 119.561,209.295 v1(121.515,209.321) ; 119.561,210.595 123.108,210.595 126.889,214.376 129.034,214.376 131.701,217.043 139.589,217.043 144.694,222.148 158.65,222.148 160.276,220.523 163.146,220.523 164.365,219.304 ; 119.561,211.245 123.04,211.245 126.679,214.884 128.823,214.884 131.49,217.551 139.379,217.551 144.535,222.707 160.961,222.707 161.825,221.844 ; 119.561,211.895 122.972,211.895 126.468,215.392 128.613,215.392 131.28,218.059 139.168,218.059 144.324,223.215 162.993,223.215 164.365,221.844 ; v1@124.818,206.045 126.873,206.045 ; 125.095,26.035 125.095,22.258 129.508,17.845 135.927,17.845 142.138,11.633 142.138,7.849 ; 125.095,44.45 121.209,40.564 121.209,25.425 129.297,17.337 135.215,17.337 140.767,11.786 140.767,10.693 ; 125.095,62.865 120.701,58.471 120.701,25.084 129.048,16.737 134.571,16.737 139.37,11.938 139.37,7.849 ; 125.095,81.28 120.193,76.378 120.193,24.874 128.838,16.229 133.954,16.229 137.998,12.185 137.998,10.693 ; 126.873,203.445 129.307,203.445 134.734,198.018 158.498,198.018 160.072,196.444 161.825,196.444 ; 126.873,204.095 129.376,204.095 134.919,198.552 158.421,198.552 160.174,200.304 163.628,200.304 164.365,201.041 164.365,201.524 ; 126.873,204.745 126.929,204.689 129.5,204.689 135.104,199.085 158.236,199.085 160.675,201.524 161.825,201.524 ; 126.873,205.395 v1(129.2,205.395) ; 126.873,206.695 127.9,206.695 v1(129.2,205.395) ; 126.873,207.345 129.206,207.345 131.091,205.461 132.335,205.461 ; 126.873,207.995 129.928,207.995 131.193,206.731 132.335,206.731 ; 126.873,208.645 130.294,208.645 130.939,208.001 132.335,208.001 ; 126.873,209.295 132.311,209.295 132.335,209.271 ; 126.873,209.945 130.293,209.945 130.902,210.555 132.321,210.555 132.335,210.541 ; 126.873,210.595 130.003,210.595 131.218,211.811 132.335,211.811 ; 126.873,211.245 129.535,211.245 131.37,213.081 132.335,213.081 ; 126.873,211.895 129.068,211.895 131.523,214.351 132.335,214.351 ; 127.375,218.973 127.426,219.024 ; v1@129.211,205.384 v1(129.2,205.395) ; 137.668,144.678 144.348,137.998 144.348,118.542 143.383,117.577 143.383,95.047 151.308,87.122 151.308,81.204 168.148,64.364 168.148,43.053 154.61,29.515 154.61,10.693 ; 137.98,41.377 139.395,39.962 139.395,17.602 146.304,10.693 ; 141.835,204.191 141.835,203.809 142.47,203.175 154.379,203.175 156.72,205.515 156.72,209.753 161.19,214.224 161.825,214.224 ; 141.835,205.461 140.616,205.461 140.184,205.029 140.184,203.693 141.211,202.667 154.59,202.667 157.228,205.304 157.228,209.474 160.758,213.004 163.146,213.004 164.365,214.224 ; 141.835,206.731 140.768,206.731 139.676,205.638 139.676,203.483 141,202.159 154.8,202.159 157.736,205.094 157.736,208.077 161.342,211.684 161.825,211.684 ; 141.835,208.001 140.921,208.001 139.168,206.248 139.168,203.272 140.79,201.651 155.011,201.651 158.244,204.884 158.244,207.866 160.816,210.439 163.12,210.439 164.365,211.684 ; 141.835,209.271 140.946,209.271 138.66,206.985 138.66,203.062 140.58,201.143 155.221,201.143 158.802,204.724 158.802,207.569 160.377,209.144 161.825,209.144 ; 141.835,210.541 140.87,210.541 138.152,207.823 138.152,202.852 140.369,200.635 155.551,200.635 159.31,204.394 159.31,207.213 159.945,207.848 163.07,207.848 164.365,209.144 ; 141.835,211.811 140.616,211.811 137.644,208.839 137.644,202.641 140.159,200.127 157.525,200.127 161.462,204.064 161.825,204.064 ; 142.775,213.081 141.835,213.081 140.565,213.081 137.136,209.652 137.136,202.431 139.948,199.619 157.736,199.619 160.936,202.819 163.12,202.819 164.365,204.064 ; 142.875,121.285 142.875,94.836 150.8,86.912 150.8,80.993 167.64,64.153 167.64,43.263 153.238,28.862 153.238,7.849 ; 151.841,10.693 151.841,28.183 165.633,41.975 165.633,43.053
  Top Layer w0.508: 14.015,31.699 15.616,30.099 16.942,30.099 18.415,28.625 18.415,28.499 ; 21.615,31.699 20.041,30.124 20.041,9.271 24.638,4.674 170.663,4.674 175.641,9.652 175.641,35.838 178.384,38.582 ; 46.634,111.912 50.673,107.874 58.75,107.874 73.672,92.952 73.672,90.793 74.93,89.535 ; 54.61,110.49 52.527,112.573 52.527,126.187 54.61,128.27 52.451,130.429 52.451,144.526 54.61,146.685 62.844,154.919 149.55,154.919 162.103,142.367 162.103,104.953 153.67,96.52 ; 69.215,110.49 66.751,112.954 66.751,125.806 69.215,128.27 66.827,130.658 66.827,144.297 69.215,146.685 76.687,154.157 149.235,154.157 161.341,142.051 161.341,109.808 151.46,99.927 151.46,93.269 153.289,91.44 153.67,91.44 ; 85.725,146.685 97.104,146.685 103.815,153.395 140.265,153.395 148.88,144.78 153.67,144.78 160.579,137.871 160.579,110.124 147.077,96.622 v1(145.466,96.622) ; 100.241,88.989 102.337,91.084 102.337,105.308 100.33,107.315 102.667,109.652 102.667,124.739 101.676,125.73 100.33,125.73 ; 100.33,88.9 102.641,86.589 102.641,72.796 100.33,70.485 102.464,68.351 102.464,54.204 100.33,52.07 102.743,49.657 102.743,36.068 100.33,33.655 98.45,31.775 98.45,25.222 104.064,19.609 v1(116.637,19.609) ; 100.33,118.11 98.501,119.939 98.501,130.124 102.946,134.569 102.946,148.224 106.594,151.871 139.634,151.871 150.597,140.908 150.597,118.643 153.67,115.57 ; 100.33,128.27 104.902,128.27 v1(108.077,125.095) ; 100.33,146.685 106.278,152.633 139.949,152.633 152.883,139.7 153.67,139.7 157.672,139.7 159.817,137.556 159.817,110.439 148.565,99.187 v1(146.507,99.187) ; 108.448,119.474 108.462,119.46 108.462,116.688 ; 108.516,144.704 108.516,148.117 108.524,148.125 ; 109.652,109.245 106.756,112.141 106.756,120.472 107.958,121.674 109.398,121.674 115.413,121.674 116.154,120.932 ; 109.728,137.693 106.782,140.64 106.782,149.225 107.882,150.325 109.474,150.325 115.527,150.325 115.545,150.343 115.595,150.393 122.743,150.393 124.013,149.123 ; 110.348,119.474 115.073,119.474 116.154,118.392 ; 110.424,148.125 115.222,148.125 115.545,147.803 ; 121.737,117.475 123.311,119.05 126.924,119.05 127.889,120.015 ; 121.813,145.923 121.793,145.903 121.793,142.671 122.562,141.902 122.562,127.102 127.889,121.775 127.889,120.015 ; 129.337,120.675 129.337,135.534 127.508,137.363 127.508,147.218 129.413,149.123 ; 132.335,204.191 v1(135.155,204.191) ; 132.335,215.621 136.425,215.621 137.695,214.351 141.835,214.351 ; 135.677,44.772 135.694,44.755 135.694,41.377 ; 136.169,34.29 132.918,37.541 132.918,45.771 135.077,47.93 136.304,47.93 136.601,47.633 ; 136.627,47.93 142.951,47.93 ; 137.551,45.39 142.951,45.39 ; 138.481,89.865 138.481,104.496 127.889,115.087 127.889,120.015 ; v1(139.702,215.621) 141.835,215.621 145.239,215.621 146.737,214.122 146.737,212.954 ; 140.665,89.865 140.489,89.689 140.489,72.108 148.8,63.797 148.8,52.393 154.076,47.117 154.076,45.669 153.111,44.704 149.524,44.704 147.975,43.155 ; 146.406,204.881 146.996,204.881 v1(148.084,205.969) ; 153.037,204.757 151.18,204.757 149.906,206.031 149.938,206.063 v1(149.938,207.696) 149.912,207.721 149.912,209.067 151.499,210.654 153.037,210.654 ; 153.037,207.043 153.45,207.043 154.967,208.559 154.967,211.709 153.722,212.954 153.037,212.954
  Top Layer w0.635: 103.913,212.184 103.347,212.184 101.729,210.566 101.729,208.102 103.227,206.604 103.963,206.604 ; 103.913,214.47 104.962,214.47 106.16,213.272 107.095,213.272 106.885,213.062 106.885,211.125 104.664,208.904 103.963,208.904 ; 103.963,200.584 104.319,200.228 ; v1(108.891,213.36) 109.954,214.422 110.595,214.422 ; 121.813,149.123 121.158,149.123 119.736,147.701 119.736,143.561 121.737,141.56 121.737,120.675 120.403,119.342 120.403,116.045 121.691,114.757 127.052,114.757 136.017,105.792 136.017,86.906 138.481,84.442 138.481,72.949 147.975,63.455 147.975,46.355
  Top Layer w1: 98.325,201.524 98.808,201.524 103.227,197.104 113.844,197.104 115.064,198.323 115.064,199.865 ; 98.325,209.144 103.165,204.304 103.963,204.304 103.963,200.584 ; 103.963,206.604 110.263,206.604 ; 107.843,217.322 v1(107.843,218.788) v1@107.85,218.796 ; v1(107.926,200.228) 110.319,200.228 ; v1@116.74,220.624 v1(116.747,220.617) 116.747,218.973 ; 118.83,218.973 122.081,218.973 122.107,218.948 122.107,216.052 ; 124.393,216.052 124.393,218.948 124.367,218.973 127.578,218.973 ; 129.712,219.024 129.712,220.693 v1(129.719,220.701) ; v1(144.68,212.928) 144.705,212.954 146.737,212.954 153.037,212.954 ; 147.037,219.202 v1@150.141,219.202 ; 153.037,219.202 161.723,219.202 161.825,219.304 ; 153.037,215.254 153.037,219.202
  Top Layer w1.27: 6.985,86.36 34.925,86.36 ; 6.985,91.44 34.925,91.44 ; 6.985,93.98 4.902,93.98 3.175,92.253 3.175,43.764 8.357,38.583 13.716,38.583 13.716,43.891 ; 9.874,140.524 9.874,144.341 14.757,149.225 28.677,149.225 43.739,134.163 43.739,90.297 v1@46.838,87.198 ; 12.856,143.507 12.856,129.239 8.738,125.12 8.738,111.531 8.738,109.957 10.49,108.204 26.949,108.204 28.88,110.134 28.88,111.531 ; 13.716,36.043 13.716,31.999 14.015,31.699 ; 13.716,46.431 15.265,46.431 16.215,45.481 16.215,33.919 ; 13.716,48.971 18.415,48.971 ; 15.838,146.489 15.838,128.462 13.818,126.441 13.818,111.531 20.472,111.531 23.038,114.097 32.41,114.097 33.96,112.547 33.96,111.531 ; 16.215,31.699 16.215,33.919 ; 21.615,28.499 27.744,28.499 27.762,28.481 ; v1(25.425,23.038) 35.916,23.038 69.85,56.972 69.85,89.535 ; 27.762,30.767 27.777,30.781 27.777,36.728 ; 31.42,111.531 31.42,107.874 37.948,101.346 37.948,72.517 36.551,71.12 34.925,71.12 ; 54.61,89.535 54.61,72.314 16.215,33.919 ; 129.337,117.475 135.934,117.475 135.959,117.5 ; 129.413,145.923 130.715,147.226 133.934,147.226 ; 133.934,144.94 133.934,143.154 134.91,142.178 137.668,142.178 ; 138.245,117.5 139.09,117.5 140.375,118.785 140.375,121.285 ; v1(145.898,104.292) 146.812,104.292 150.266,107.747 v1(150.266,107.772) ; 155.575,43.155 159.901,43.155 159.995,43.249 ; 159.995,45.535 165.615,45.535 165.633,45.553 ; 177.851,42.799 178.384,42.799 ; 178.384,24.105 179.857,24.105 185.318,29.566 185.318,141.224 181.762,144.78 180.34,144.78 ; 178.384,28.322 183.337,33.275 183.337,53.035 177.419,58.953 177.419,62.205 ; 178.384,38.582 179.12,38.582 ; 180.34,62.23 177.444,62.23 177.419,62.205 ; 180.34,72.39 185.039,72.39 ; 180.34,86.36 177.419,86.36 ; 180.34,96.52 185.242,96.52 ; 180.34,110.49 177.419,110.49 ; 180.34,120.65 185.039,120.65 ; 180.34,134.62 179.095,134.62 177.419,132.944 177.419,110.49 ; 177.419,62.205 177.419,86.36 ; 177.419,86.36 177.419,110.49
  Top Layer w2.54: 138.481,89.865 140.665,89.865 142.681,89.865
  Bottom Layer w0.254: 6.985,63.5 10.922,67.437 10.922,82.176 26.688,97.942 71.425,97.942 84.912,84.455 85.725,84.455 ; 6.985,66.04 10.414,69.469 10.414,82.387 26.477,98.45 71.229,98.45 75.013,102.235 85.725,102.235 ; 6.985,68.58 9.906,71.501 9.906,82.597 26.267,98.958 71.018,98.958 74.93,102.87 74.93,109.855 85.725,120.65 ; 6.985,76.2 9.398,78.613 9.398,82.808 29.46,102.87 54.61,102.87 ; 6.985,78.74 8.89,80.645 8.89,83.018 46.522,120.65 54.61,120.65 ; 6.985,81.28 6.985,81.832 45.72,120.567 45.72,132.08 52.705,139.065 54.61,139.065 ; 6.985,83.82 8.255,83.82 45.085,120.65 45.085,132.163 53.257,140.335 84.455,140.335 85.725,139.065 ; 30.277,36.728 35.433,31.572 35.433,10.693 ; 34.925,60.96 48.108,60.96 87.147,21.92 127.711,21.92 133.299,27.508 133.299,40.564 138.125,45.39 142.951,45.39 143.84,44.501 148.829,44.501 150.175,43.155 ; 34.925,63.5 50.8,63.5 85.725,28.575 ; 34.925,66.04 66.446,66.04 85.496,46.99 85.725,46.99 ; 34.925,68.58 65.964,68.58 69.139,65.405 85.725,65.405 ; 34.925,76.2 46.841,76.2 48.518,74.524 102.464,74.524 104.013,72.974 104.013,35.052 110.49,28.575 ; 34.925,78.74 34.983,78.682 45.078,78.682 48.728,75.032 102.674,75.032 104.521,73.185 104.521,52.959 110.49,46.99 ; 34.925,81.28 43.198,81.28 48.939,75.54 102.884,75.54 105.029,73.395 105.029,66.751 106.375,65.405 110.49,65.405 ; 34.925,83.82 41.377,83.82 49.149,76.048 102.718,76.048 110.49,83.82 ; 34.925,86.36 39.555,86.36 49.359,76.556 102.507,76.556 106.426,80.474 106.426,108.664 116.154,118.392 ; 34.925,91.44 35.193,91.44 49.57,77.064 102.297,77.064 105.918,80.685 105.918,142.088 111.633,147.803 115.545,147.803 122.134,147.803 124.013,145.923 ; 38.735,172.212 39.878,171.069 73.152,171.069 74.295,172.212 ; 38.735,174.752 39.878,173.609 73.152,173.609 74.295,174.752 ; 38.735,177.292 39.878,176.149 73.152,176.149 74.295,177.292 ; 38.735,179.832 39.878,178.689 73.152,178.689 74.295,179.832 ; 38.735,182.372 39.878,181.229 73.152,181.229 74.295,182.372 ; 38.735,184.912 39.878,183.769 73.152,183.769 74.295,184.912 ; 38.735,187.452 39.878,186.309 73.152,186.309 74.295,187.452 ; 38.735,189.992 39.878,188.849 73.152,188.849 74.295,189.992 ; 38.735,192.532 39.878,193.675 73.152,193.675 74.295,192.532 ; 38.735,195.072 39.878,196.215 73.152,196.215 74.295,195.072 ; 38.735,197.612 39.878,198.755 73.152,198.755 74.295,197.612 ; 38.735,200.152 39.878,201.295 73.152,201.295 74.295,200.152 ; 38.735,202.692 39.878,203.835 73.152,203.835 74.295,202.692 ; 38.735,205.232 39.878,206.375 73.152,206.375 74.295,205.232 ; 38.735,207.772 39.878,208.915 73.152,208.915 74.295,207.772 ; 38.735,210.312 39.878,211.455 73.152,211.455 74.295,210.312
  Bottom Layer w0.508: 100.33,36.195 97.993,38.532 ; 100.33,62.865 102.464,60.731 102.464,46.584 100.33,44.45 102.54,42.24 102.54,28.245 100.33,26.035 103.048,23.317 127.102,23.317 131.902,28.118 131.902,41.142 151.765,61.005 151.765,65.634 153.441,67.31 153.67,67.31 ; 100.33,73.025 97.815,70.51 97.815,57.125 100.33,54.61 97.993,52.273 97.993,38.532 ; 100.33,81.28 100.762,81.28 102.184,82.702 102.184,97.841 100.33,99.695 102.311,101.676 102.311,116.129 100.33,118.11 ; 100.33,91.44 98.222,93.548 98.222,108.661 99.416,109.855 100.33,109.855 98.146,112.039 98.146,126.416 100,128.27 100.33,128.27 ; v1(108.077,125.095) 109.806,125.095 113.502,128.791 145.529,128.791 153.67,120.65 ; 110.49,36.195 112.725,38.43 112.725,52.375 110.49,54.61 113.106,57.226 113.106,70.409 110.49,73.025 120.828,73.025 134.874,87.071 144.221,87.071 153.67,96.52 ; 110.49,91.618 110.49,91.44 115.443,86.487 130.378,86.487 140.513,96.622 v1(145.466,96.622) ; 116.154,118.392 116.507,118.745 122.667,118.745 123.937,117.475 ; 116.154,120.932 117.828,122.606 122.53,122.606 123.937,121.199 123.937,120.675 ; v1@116.535,19.634 158.648,19.634 170.358,31.344 175.363,31.344 178.384,28.322 ; 125.095,36.195 127.432,38.532 127.432,53.137 125.959,54.61 125.095,54.61 127.559,57.074 127.559,71.069 125.603,73.025 ; 125.095,73.025 125.603,73.025 ; 125.095,91.44 134.254,91.44 142.001,99.187 v1(146.507,99.187) ; 142.951,47.93 148.6,47.93 150.175,46.355 ; 149.912,210.109 149.912,207.721 v1(149.938,207.696) ; 153.67,72.39 155.702,70.358 155.702,59.131 153.441,56.871 148.708,56.871 132.664,40.827 132.664,27.802 127.417,22.555 101.549,22.555 97.993,26.111 97.993,38.532 ; 153.67,91.44 135.255,73.025 125.603,73.025
  Bottom Layer w0.635: v1(106.834,211.226) 107.926,210.134 107.926,208.915
  Bottom Layer w1: 103.176,215.958 106.747,215.958 106.758,215.969 ; v1(107.52,206.629) 111.812,206.629 ; v1(107.926,200.228) 107.926,202.915 ; 119.534,202.964 118.187,202.964 v1(117.705,203.445) 113.523,203.445 111.812,205.156 111.812,206.629 ; 119.585,210.345 117.709,210.345 117.31,209.945 113.605,209.945 111.812,208.153 111.812,206.629 ; v1(124.792,206.07) 126.893,206.07 126.9,206.063 126.9,207.366 133.555,214.02 139.684,214.02 139.684,217.043 ; 141.97,214.02 141.97,217.043 ; v1(144.68,212.928) 144.68,215.265 145.518,216.103
  Bottom Layer w1.27: 6.985,71.12 4.445,71.12 2.54,73.025 2.54,100.965 11.278,109.703 11.278,111.531 ; 8.357,36.043 8.357,26.086 11.405,23.038 16.231,23.038 ; 16.215,28.499 16.215,23.053 16.231,23.038 ; 18.415,31.7 18.415,46.431 ; 18.415,48.971 18.415,77.47 34.925,93.98 ; v1(25.425,23.038) 16.231,23.038 ; v1(44.374,89.662) 47.447,86.589 60.452,86.589 62.23,88.367 62.23,89.535 ; 72.39,26.035 72.39,27.483 73.863,28.956 76.581,28.956 89.002,16.535 175.032,16.535 178.384,19.887 ; 129.337,120.675 135.23,120.675 159.563,96.342 159.563,50.343 ; 132.512,99.085 137.719,104.292 v1(145.898,104.292) ; 132.588,127.533 140.335,127.533 144.755,123.114 144.755,113.306 161.087,96.973 161.087,57.125 166.345,51.867 176.912,51.867 181.127,47.652 181.127,42.621 ; 155.575,46.355 159.563,50.343 ; 159.029,24.13 170.053,35.154 179.578,35.154 181.127,36.703 181.127,42.621 ; 178.384,38.582 175.59,41.376 175.59,48.641 173.888,50.343 159.563,50.343 ; 178.384,42.799 180.95,42.799 181.127,42.621
  other v1: 46.812,87.173 46.203,87.808 45.593,88.417 44.958,89.027 5.639,156.642 1.118,156.693 2.362,156.743 3.48,156.743 4.623,156.743 1.118,157.734 2.261,157.734 3.429,157.759 4.445,157.81 5.588,157.81 159.69,174.65 160.528,174.981 136.931,175.006 91.618,175.108 113.716,175.133 90.703,175.514 159.766,175.946 114.503,176.174 137.617,176.327 91.643,176.428 160.579,176.809 90.78,176.962 136.804,177.038 113.767,177.165 159.664,177.495 91.313,178.13 114.554,178.13 137.516,178.232 160.528,178.562 159.664,179.095 121.312,204.089 91.694,204.622 90.653,204.673 91.694,205.638 90.653,205.765 108.358,206.654 91.669,206.781 90.602,206.959 91.643,207.924 169.926,208.204 90.602,208.229 169.012,208.686 91.669,209.067 90.602,209.296 136.4,215.595 150.166,219.177

## Polygon pours and split planes (outlines as drawn)
no net on Bottom Layer "Top Layer-No Net" (hatched 45Degree grid 0.508 track 0.203, remove dead copper, pour order 14): 93.245,194.539 122.455,194.539 122.455,208.509 123.725,208.509 123.725,194.539 167.54,194.539 167.54,223.749 123.725,223.749 123.725,209.779 122.455,209.779 122.455,223.749 93.245,223.749 93.245,194.539
no net on Bottom Layer "Top Layer-No Net" (hatched 45Degree grid 0.508 track 0.203, remove dead copper, pour order 3): 1.27,154.94 1.27,1.27 186.055,1.27 186.055,154.94

## Keep-outs
Keep-Out Layer:
  lines w0.254: 0,0 0,156.21 0,224.384 90.17,224.384 90.17,210.312 92.229,210.312 92.229,224.384 168.429,224.384 168.429,209.475 170.383,209.475 170.383,224.384 187.325,224.384 187.325,193.904 170.383,193.904 170.383,207.467 168.429,207.467 168.429,193.904 146.939,193.904 92.229,193.904 92.229,203.962 90.17,203.962 90.17,179.019 92.202,179.019 92.202,189.992 113.157,189.992 113.157,179.248 115.214,179.248 115.214,189.992 136.144,189.992 136.144,179.451 138.201,179.451 138.201,189.992 159.156,189.992 159.156,179.73 161.214,179.73 161.214,189.992 182.143,189.992 182.143,158.242 161.214,158.242 161.214,173.939 159.156,173.939 159.156,158.242 150.749,158.242 138.201,158.242 138.201,173.812 136.144,173.812 136.144,158.242 115.214,158.242 115.214,174.295 113.157,174.295 113.157,158.242 104.445,158.242 92.202,158.242 92.202,174.422 90.17,174.422 90.17,158.242 6.401,158.242 6.401,156.21 104.445,156.21 150.749,156.21 187.325,156.21 187.325,0 0,0

## Silkscreen, mask and mechanical layers (free items; w line width, h text height)
Top Overlay:
  circle w0.254: c128.78,201.574 r0.144
  circle w0.254: c125.147,203.454 r0.137
  circle w0.254: c125.173,203.454 r0.284
  lines w0.254: 165.813,219.812 166.473,219.812 ; 167.819,218.262 167.819,223.063
  text "43" at 158.244,223.012 h1
  text "2" at 100.56,222.86 h1
  text "1" at 93.22,222.733 h1
  text "SDATA" at 155.17,221.539 h1
  text "SCLK" at 150.649,221.513 h1
  text "VINB" at 100.154,221.259 h1
  text "GND" at 93.931,219.304 h1 r90
  text "SLOAD" at 167.464,218.313 h1 r90
  text "GND" at 157.17,216.281 h1
  text "GND" at 93.931,215.443 h1 r90
  text "VING" at 101.221,215.036 h1 r90
  text "FPPZ-1024M_DOSE" at 45.085,214.198 h3
  text "D6" at 166.143,213.843 h1
  text "D7" at 158.169,213.741 h1
  text "GND" at 93.931,211.734 h1 r90
  text "D5" at 158.169,211.15 h1
  text "D4" at 166.194,211.15 h1
  text "1" at 55.296,209.812 h1
  text "1" at 68.58,209.812 h1
  text "32" at 76.033,209.812 h1
  text "32" at 83.237,209.812 h1
  text "D2" at 166.194,208.61 h1
  text "D3" at 158.169,208.559 h1
  text "GND" at 93.931,207.772 h1 r90
  text "2" at 55.296,207.272 h1
  text "2" at 68.58,207.272 h1
  text "31" at 76.367,207.272 h1
  text "31" at 83.237,207.272 h1
  text "32" at 165.94,206.172 h1
  text "GND" at 157.38,206.146 h1
  text "GND" at 93.931,204.064 h1 r90
  text "D1" at 158.502,203.784 h1
  text "D0" at 166.422,203.606 h1
  text "ADCLK" at 147.093,200.965 h1
  text "CDSCLK2" at 153.171,200.939 h1
  text "GND" at 93.931,200.254 h1 r90
  text "VINR" at 101.221,199.822 h1 r90
  text "GND" at 157.17,198.552 h1
  text "26" at 165.838,198.552 h1
  text "GND" at 93.931,196.215 h1 r90
  text "CDSCLK1" at 153.504,195.859 h1
  text "GND" at 167.438,195.123 h1 r90
  text "ADC NTK-4 MECH VPL" at 117.475,194.945 h1
  text "22" at 100.433,194.589 h1
  text "23" at 158.32,194.513 h1
  text "21" at 92.635,194.462 h1
  text "15" at 55.296,174.252 h1
  text "15" at 68.58,174.252 h1
  text "18" at 76.2,174.252 h1
  text "18" at 83.237,174.252 h1
  text "16" at 55.296,171.712 h1
  text "16" at 68.58,171.712 h1
  text "17" at 76.2,171.712 h1
  text "17" at 83.237,171.712 h1
  text "NTK-4-MECH-VPL" at 45.085,165.43 h3
  text "FPPZ-1024M_DOSE" at 148.387,102.235 h3 r90
  text "MOTHERBOARD NTK-4 MECH VPL" at 45.085,51.686 h1.52 r90

## Panel: embedded boards
"..\Мезонины\V+H.PcbDoc" at 92.202,158.242, 1 rows x 4 columns, spacing 33.75 x 23, rotation 0

## Text inside footprints (layer, text, board x,y; h text height)
X22: Top Overlay "Voltage" at 141.177,80.488 h0.63; Top Overlay "Amper" at 136.977,80.488 h0.63